# Altium PCB PCB2.PcbDoc
Units mil, origin at the board's own origin, x right, y up, seen from the top; angles counter-clockwise.
Board outline 2530 x 1210 mil, 2 copper layers (Top Layer, Bottom Layer); 26 components, 19 nets, 75 pads, 3 vias.
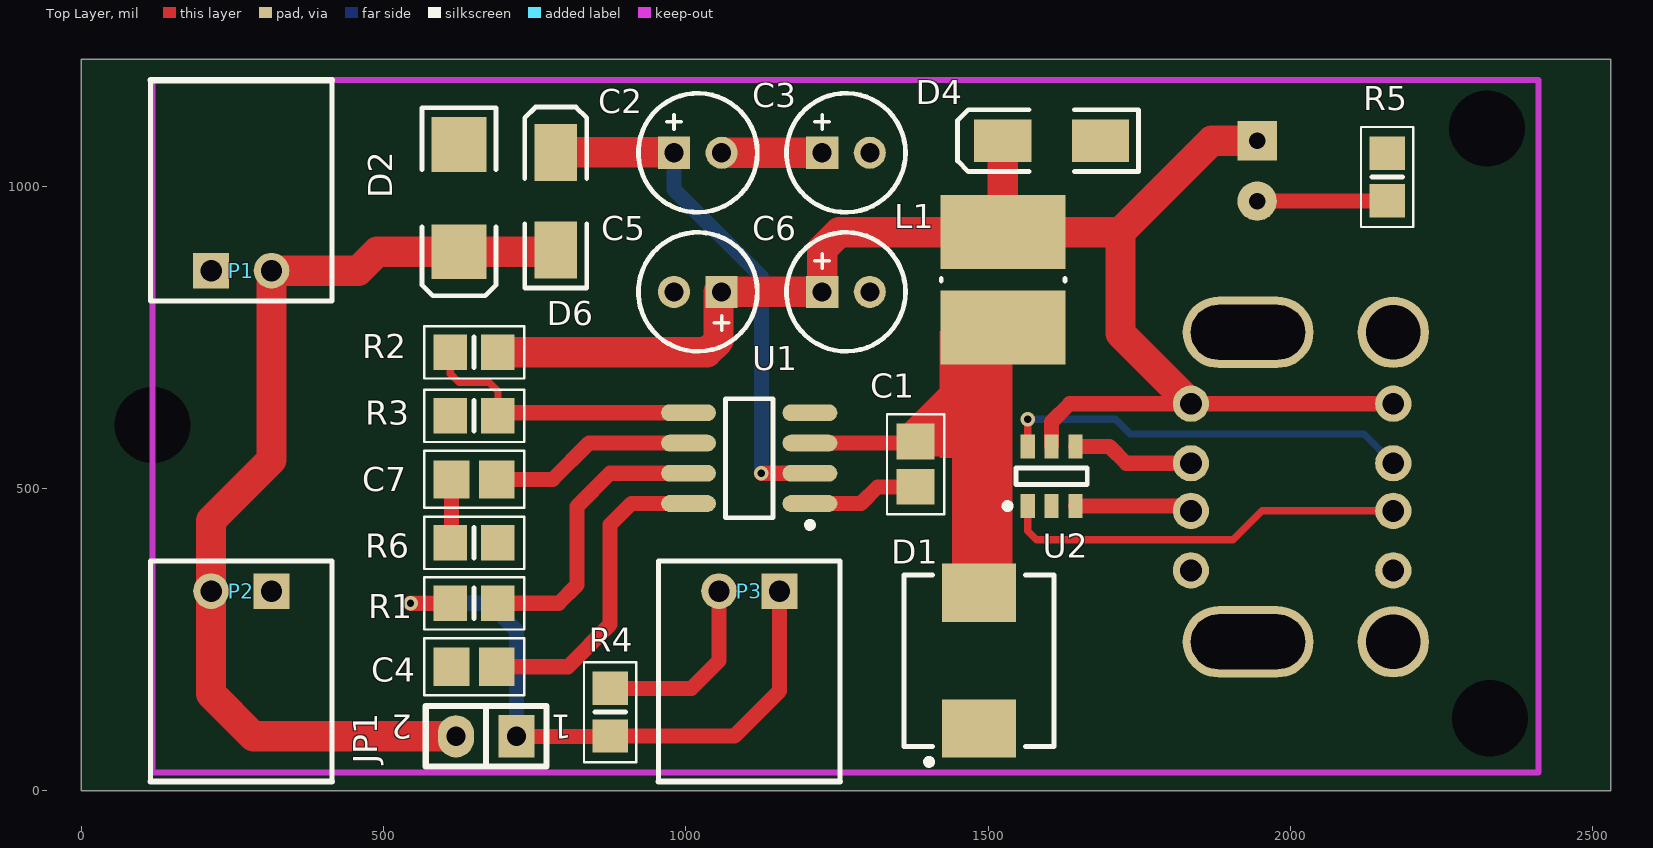
[diagram p0: Top Layer view]
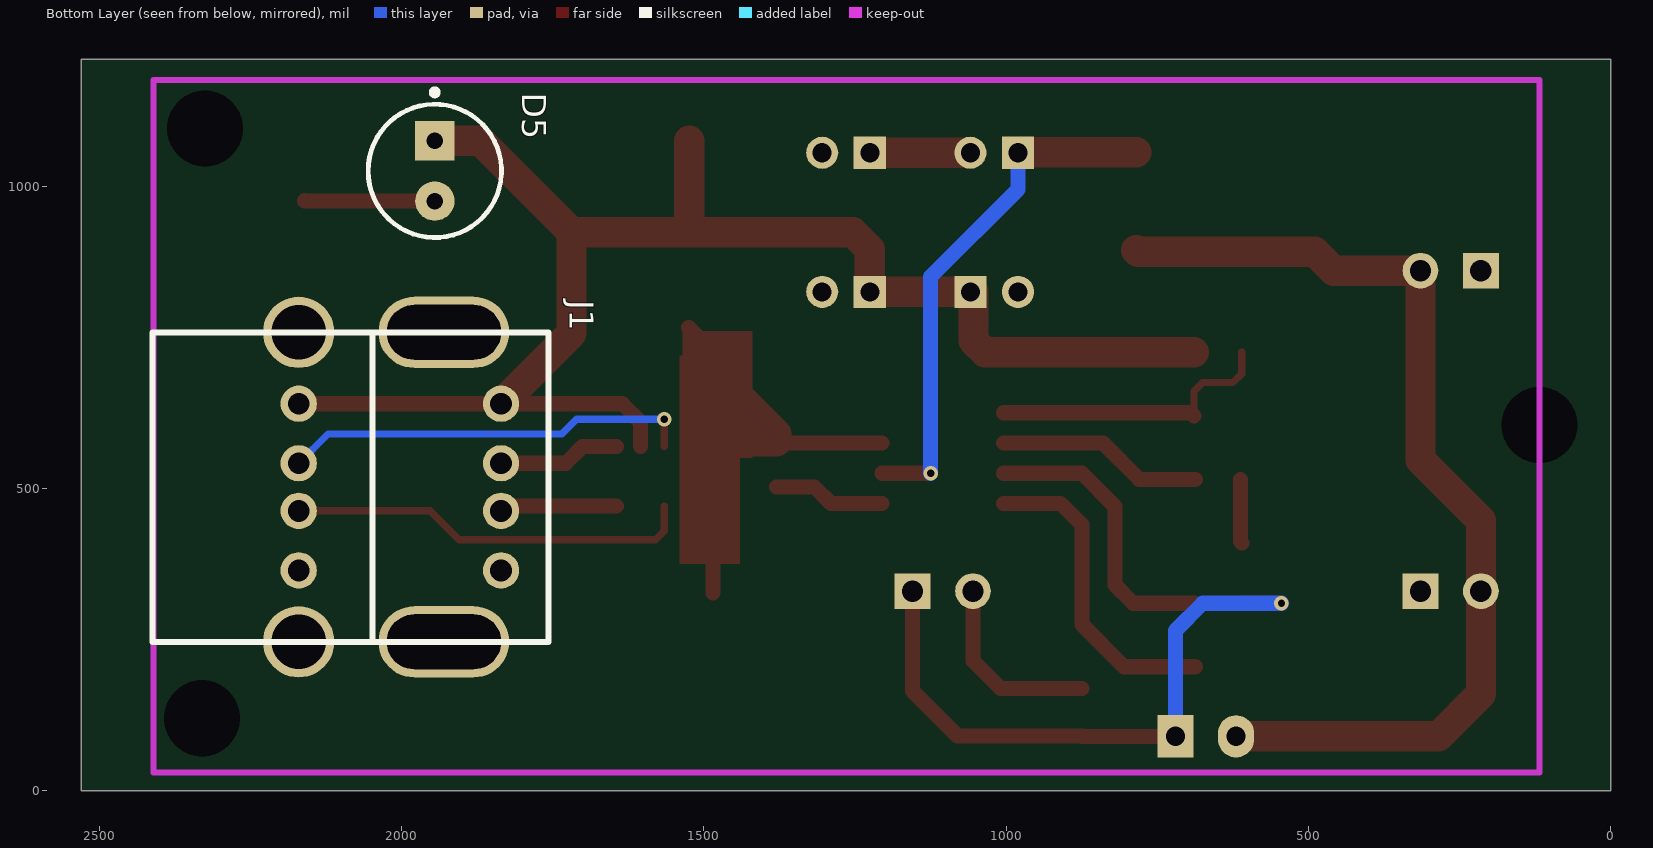
[diagram p1: Bottom Layer view, seen from below]

## Layer stack, top to bottom
Top Solder: solder mask 0.4, Solder Resist, Dk 3.5
Top Layer: signal copper 1.4
Dielectric 1: dielectric 12.6, FR-4, Dk 4.8
Bottom Layer: signal copper 1.4
Bottom Solder: solder mask 0.4, Solder Resist, Dk 3.5

## Board outline
0,0 2530,0 2530,1210 0,1210

## Design rules (kind name [scope] priority, off if disabled: settings)
Clearance [All] p1: gap=10
PolygonConnect [All] p1: connectstyle=Relief reliefconductorwidth=10 reliefentries=4 polygonreliefangle="90 Angle" airgapwidth=10
RoutingVias [All] p1: holewidth=28 width=50 viastyle="Through Hole" minholewidth=28 minwidth=50 maxholewidth=28 maxwidth=50
SolderMaskExpansion [All] p1: expansion=4
Width [All] p1: maxlimit=100 minlimit=10 preferedwidth=10
29 further rules are at their usual default settings.

## Components (designator, comment, footprint, x,y, rotation, side; value= is the part's Value field where it differs from the comment)
C1 "0.01uF" CAPC2012M 1380,540 r270 top
C2 "47uF" CAPPR2-5x11.5 1020,1055 r0 top
C3 "47uF" CAPPR2-5x11.5 1265,1055 r0 top
C4 "0.1uF" CAPC2012M 650,205 r0 top
C5 "47uF" CAPPR2-5x11.5 1020,825 r180 top
C6 "47uF" CAPPR2-5x11.5 1265,825 r0 top
C7 "3.9NF" CAPC2012M 650,515 r0 top
D1 "SK54" SMC 1485,215 r90 top
D2 "TVS" SMB 625,980 r270 top
D4 "TVS" DSO-C2/X1.8 1605,1075 r180 top
D5 "LED" LED 1945,1025 r270 bottom
D6 "1N4007" DSO-C2/X1.8 785,975 r90 top
J1 "双口USB接口" 双层USB接口 2170,640 r270 bottom
JP1 "Jumper2" JP2 670,90 r180 top
L1 "Inductor" 15mh电感 1525,845 r90 top
P1 "Header 2" XH254-2H 215,860 r0 top
P2 "Header 2" XH254-2H 315,330 r180 top
P3 "Header 2" XH254-2H 1155,330 r180 top
R1 "100K" RESC2012M 650,310 r180 top
R2 "47K" RESC2012M 650,725 r0 top
R3 "10K" RESC2012M 650,620 r0 top
R4 "100K" RESC2012M 875,130 r90 top
R5 "1K" RESC2012M 2160,1015 r270 top
R6 "6.8K" RESC2012M 650,410 r180 top
U1 "CX8505" SO8_M 1105,550 r180 top
U2 "CX2901" SOT23_6L 1605,520 r90 top

## Footprints (in the part's own frame and the unit in brackets; to place one, negate y for a bottom-side part, rotate by r counter-clockwise, add the part's x,y. Pads: shape width x height; smd on the part's side, far side on the other; paste and mask are expansions set on the pad)
15mh电感 [mm] "Precision Wire Wound Inductor, 2-Leads, Body 5.70x5.15mm, IPC Medium Density"
  rect 3.1x5.25 smd: 1(-2,0) 2(2,0)
  silkscreen extent -0.05,-2.6 0.05,2.6, body extent -2.95,-2.6 2.95,2.6, height 4.5
CAPC2012M [mm] "Chip Capacitor, Body 2.0x1.3mm, IPC Low Density"
  rect 1.5x1.6 smd: 1(-0.95,0) 2(0.95,0)
  silkscreen extent -2.1,-1.2 2.1,1.2, body extent -1.1,-0.72 1.1,0.72, height 1.1
CAPPR2-5x11.5 [mm] "Capacitor, Electrolytic, Radial; Body 5 x 11.5 mm (Dia.xH typ); Pin Spacing 2 mm (typ)"
  rect 1.35x1.35 hole 0.8: 1(-1,0)
  round 1.35 hole 0.8: 2(1,0)
  silkscreen extent -2.5,-2.5 2.5,2.5
DSO-C2/X1.8 [mm] "DO-214-AC/SMA; 2 C-Bend Leads; Body 5 x 2.7 mm, inc. leads (LxW)"
  rect 2.4x1.8 smd: 1(-2.05,0) 2(2.05,0)
  silkscreen extent -3.65,-1.3 3.95,1.3
JP2 [mil]
  rect 60x70 hole 32: 1(-50,0)
  oval 60x70 hole 32: 2(50,0)
  silkscreen extent -100,-50 100,50
LED [mm]
  rect 1.65x1.65 hole 0.7: 1(-1.27,0)
  round 1.65 hole 0.7: 2(1.27,0)
  silkscreen extent -3.42,-2.8 2.8,2.8
RESC2012M [mm] "Chip Resistor, Body 2.0x1.3mm, IPC Low Density"
  rect 1.4x1.5 smd: 1(-1,0) 2(1,0)
  silkscreen extent -2.1,-1.1 2.1,1.1, body extent -1.07,-0.7 1.07,0.7, height 0.65
SMB [mm] "DO-214-AA/SMB; 2 C-Bend Leads; Body 5.3 x 3.6 mm, inc. leads (LxW)"
  rect 2.3x2.3 smd: 1(-2.25,0) 2(2.25,0)
  silkscreen extent -3.8,-1.55 4.1,1.55
SMC [mm] "Molded Diode, 2-Leads, Body 6.85x5.90mm, IPC Medium Density"
  rect 2.45x3.1 smd: 1(-2.85,0) 2(2.85,0)
  silkscreen extent -4.37,-3.15 3.6,3.15
SO8_M [mm] "SOIC, 8-Leads, Body 4.9x3.9mm, Pitch 1.27mm, IPC Low Density"
  oval 2.3x0.7 smd: 1(-2.55,1.905) 2(-2.55,0.635) 3(-2.55,-0.635) 4(-2.55,-1.905) 5(2.55,-1.905) 6(2.55,-0.635) 7(2.55,0.635) 8(2.55,1.905)
  silkscreen extent -2.68,-2.5 1,2.93, body extent -2,-2.5 2,2.5, height 1.75
SOT23_6L [mm] "手机充电识别芯片"
  rect 1x0.6 smd: 1(-1.25,1) 2(-1.25,0) 3(-1.25,-1) 4(1.25,-1) 5(1.25,0) 6(1.25,1)
  silkscreen extent -1.37,-1.5 0.35,1.97, body extent -0.87,-1.51 0.87,1.51, height 1.45
XH254-2H [mm] "Connector; Header; 2 Position"
  rect 1.5x1.5 hole 0.9: 1(0,0)
  round 1.5 hole 0.9: 2(2.54,0)
  silkscreen extent -2.54,-1.27 5.08,8
双层USB接口 [mm]
  round 1.524 hole 0.92: 1(0,0) 2(2.5,0) 3(4.5,0) 4(7,0) 7(0,8.5) 8(2.5,8.5) 9(4.5,8.5) 10(7,8.5)
  round 3 hole 2.3: 5(-3,0) 6(10,0)
  oval 3x5.5 hole 2.3 slot 4.8 at 90 deg: 11(-3,6.1) 12(10,6.1)
  silkscreen extent -3,-6.15 10,10.5

## Part data
C1 C4 C7: library part Cap, "Capacitor"
C2 C3 C5 C6: library part "Cap Pol2", "Polarized Capacitor (22uf-47uf)"
D1 D6: library part Diode, "Default Diode"
D2 D4: "TVS瞬态抑制二极管"
D5: "Typical INFRARED GaAs LED"
P1 P2 P3: "Header, 2-Pin"
R1 R2 R3 R4 R5 R6: library part Res, "Resistor"

## Free pads (board coordinates)
  round 60 hole 125.98: 0(118.11,605) 1(2325,1095) 2(2330,120)

## Via types
v1: diameter 24, hole 12, Top Layer to Bottom Layer, 3 vias

## Nets (pads, with @x,y where several pads share a name; then routed paths per layer and width w, separated by ;. In a path a pad name is that pad's centre, name@x,y a point inside that pad or via, vN(x,y) a via of type N, cw(c..) or ccw(c..) an arc to the next point about the centre after c; other vN are vias at no path point)
+12V: D2.2 D6.1 JP1.2 P1.2 P2.2 | length 1649.6
  Top Layer w50: P1.2@315,850 315,547 215,447 215,160 285,90 JP1.2 ; P1.2 458.58,860 490,891.42 D2.2 782.13,891.42 D6.1
EN: JP1.1 P3.1 R1.2 R4.1 | length 1065.3
  Top Layer w25: v1(545,310) R1.2 ; JP1.1 874.37,90 R4.1 1080.63,90.63 1155,165 P3.1
  Bottom Layer w25: v1(545,310) 675,310 720,265 JP1.1
GND: C3.2 C4.1 C5.2 C6.2 D1.1 D2.1 D4.1 J1.4 J1.5 J1.6 J1.10 J1.11 J1.12 P1.1 P2.1 R3.1 R5.1 R6.1 U1.4 U2.2
NetC1_1: C1.1 D1.2 L1.1 U1.3 | length 783.4
  Top Layer w25: U1.3 1377.6,575 C1.1 ; D1.2 1485,580 ; 1485,695 1485,726.26 L1.1
  Top Layer w50: 1485,580 1482.4,577.4 C1.1 1380,590 1485,695
NetC1_2: C1.2 U1.1 | length 186
  Top Layer w25: U1.1 1290,475 1317.6,502.6 C1.2
NetC2_1: C2.1 D6.2 U1.2 | length 866.1
  Top Layer w25: v1(1125,525) U1.2
  Top Layer w50: D6.2 979.92,1055.71 C2.1
  Bottom Layer w25: C2.1 980.63,994.37 1125,850 v1(1125,525)
NetC2_2: C2.2 C3.1 | length 166.3
  Top Layer w50: C2.2 C3.1
NetC4_2: C4.2 U1.8 | length 525.7
  Top Layer w25: C4.2 805,205 875,275 875,440 910,475 U1.8
NetC7_1: C7.1 R6.2 | length 105.8
  Top Layer w25: R6.2 612.6,411.97 C7.1
NetC7_2: C7.2 U1.6 | length 342.1
  Top Layer w25: C7.2 780,515 840,575 U1.6
NetD5_2: D5.2 R5.2 | length 215.3
  Top Layer w25: D5.2 2159.37,975 R5.2
NetP3_2: P3.2 R4.2 | length 313.9
  Top Layer w25: R4.2 1009.37,169.37 1055,215 P3.2
NetR1_1: R1.1 U1.7 | length 480.4
  Top Layer w25: R1.1 790,310 820,340 820,470 875,525 U1.7
NetR2_1: R2.1 R3.2 U1.5 | length 484.2
  Top Layer w12: R2.1 610.63,689.37 625,675 675,675 689.37,660.63 R3.2
  Top Layer w25: R3.2 694.37,625 U1.5
USB1D+: J1.3 U2.1 | length 671.6
  Top Layer w12: U2.1 1565.63,429.37 1580,415 1905,415 1952.83,462.83 J1.3
USB1D-: J1.2 U2.6 | length 679.7
  Top Layer w12: U2.6 v1(1565.63,614.37)
  Bottom Layer w12: v1(1565.63,614.37) 1710.63,614.37 1735,590 2121.57,590 J1.2
USB2D+: J1.9 U2.3 | length 194.3
  Top Layer w25: U2.3 1827.4,470.79 J1.9
USB2D-: J1.8 U2.4 | length 202.4
  Top Layer w25: U2.4 1700.79,569.21 1728.43,541.57 J1.8
VOUT_5V: C5.1 C6.1 D4.2 D5.1 J1.1 J1.7 L1.2 R2.2 U2.5 | length 2576
  Top Layer w25: U2.5 1605,610 1635,640 J1.7 J1.1
  Top Layer w50: R2.2 1035,725 1054.37,744.37 1054.37,825 C5.1 C6.1@1210.63,825 ; C6.1 1225.63,895.63 1253.74,923.74 L1.2 ; D4.2 1524.29,924.45 L1.2 ; J1.7 1718.74,756.61 1718.74,923.74 ; D5.1 1870,1075 1718.74,923.74 ; L1.2 1718.74,923.74

## Keep-outs
Keep-Out Layer:
  lines w10: 118.11,30 2410,30 2410,1175 118.11,1175 118.11,30

## Other copper
Top Layer:
  rectangle net NetC1_1: 1420,550 1535,760
  rectangle net NetC1_1: 1440,375 1540,720

## Silkscreen, mask and mechanical layers (free items; w line width, h text height)
Mechanical 1:
  the board outline again, w10

## Text inside footprints (layer, text, board x,y; h text height)
JP1: Top Overlay "2" at 547.95,125.43 h40 r180; Top Overlay "1" at 811.73,125.43 h40 r180